# EAGLE board MAPE-CUN-Large-001-not_used (EAGLE 7.3.0)
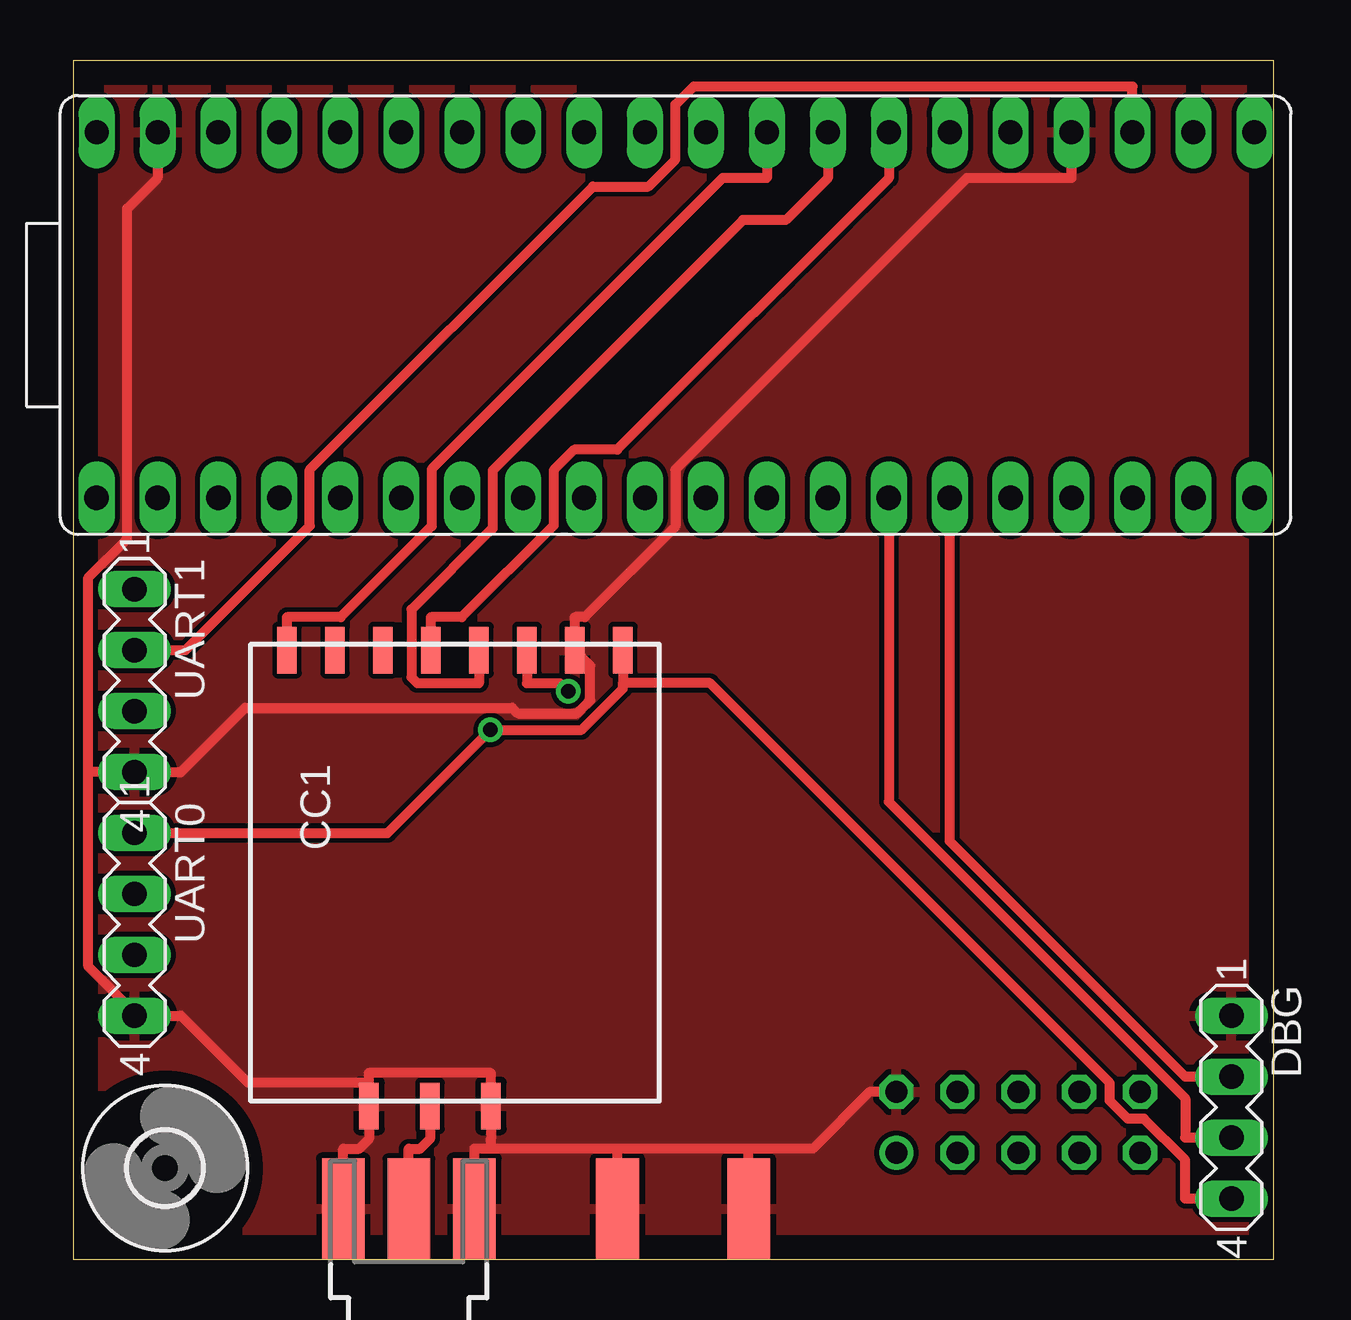
[diagram p0: board, top side]
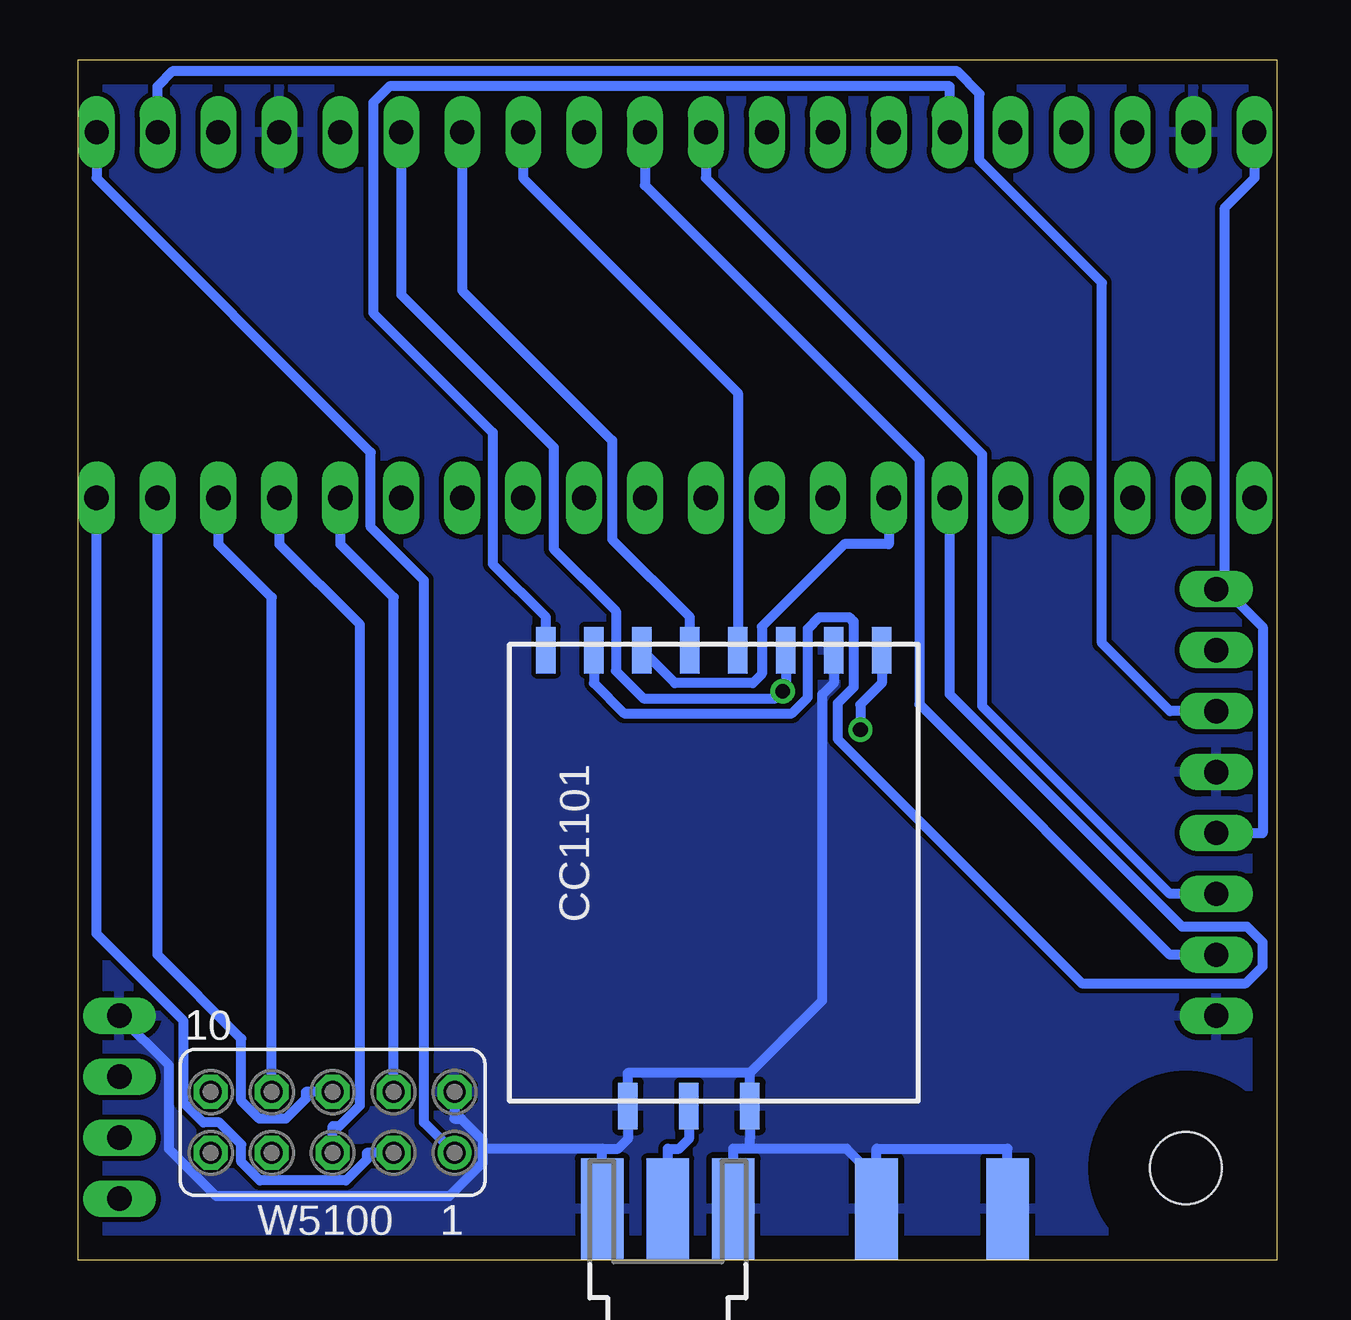
[diagram p1: board, bottom side, seen from below]

Size 50 x 50 mm. Coordinates in mm from the lower left corner, seen from the top.
Outline: 0,0 0,50 50,50 50,0 0,0
Copper layers (1*16): Top 0.035mm / dielectric 1.5mm / Bottom 0.035mm
Design rules "default": minimum track width 10mil, minimum drill 24mil, track to track 8mil, track to pad 8mil, pad to pad 8mil, via to via 8mil, smd to smd 8mil, copper to edge 40mil, drill to drill 8mil, minimum pad ring 10mil, minimum via ring 8mil, stop-mask expansion 4mil, vias tented up to drill 0mil, thermal gap 10mil
Net classes: 0 default: width 0.406 mm; 1 PWR: width 0.305 mm

## Footprints (pad centres in the part's own frame; a part is rotated, then mirrored left to right if it is on the bottom)
CC1101_MODULE1_SMD = smd 1.93 x 0.813: ANT 19,5.96; CSN 0,0; GDO0 0,2; GDO2 0,4; GND@0 0,12; GND@1 19,8.5; GND@2 19,3.42; MISO 0,6; MOSI 0,10; SCLK 0,8; VCC 0,14
MA04-1 = drill 1.016 long: 1 -3.81,0; 2 -1.27,0; 3 1.27,0; 4 3.81,0
3,0 = hole 3: 0,0
20-DIP = drill 1.016 pad 1.27 long: 1 -24.13,-7.62; 2 -21.59,-7.62; 3 -19.05,-7.62; 4 -16.51,-7.62; 5 -13.97,-7.62; 6 -11.43,-7.62; 7 -8.89,-7.62; 8 -6.35,-7.62; 9 -3.81,-7.62; 10 -1.27,-7.62; 11 1.27,-7.62; 12 3.81,-7.62; 13 6.35,-7.62; 14 8.89,-7.62; 15 11.43,-7.62; 16 13.97,-7.62; 17 16.51,-7.62; 18 19.05,-7.62; 19 21.59,-7.62; 20 24.13,-7.62 | drill 1 pad 1.27 long: 21 24.13,7.62; 22 21.59,7.62; 23 19.05,7.62; 24 16.51,7.62; 25 13.97,7.62; 26 11.43,7.62; 27 8.89,7.62; 28 6.35,7.62; 29 3.81,7.62; 30 1.27,7.62; 31 -1.27,7.62; 32 -3.81,7.62; 33 -6.35,7.62; 34 -8.89,7.62; 35 -11.43,7.62; 36 -13.97,7.62; 37 -16.51,7.62; 38 -19.05,7.62; 39 -21.59,7.62; 40 -24.13,7.62
FE05-2 = drill 0.914: 1 -5.08,1.27 | drill 0.914 octagon: 2 -5.08,-1.27; 3 -2.54,1.27; 4 -2.54,-1.27; 5 0,1.27; 6 0,-1.27; 7 2.54,1.27; 8 2.54,-1.27; 9 5.08,1.27; 10 5.08,-1.27
SMA = smd 4.191 x 1.778: 1 2.115,0; GND@1 2.115,2.733; GND@2 2.115,-2.733 | smd 4.191 x 1.778 bottom: GND@3 2.115,2.733; GND@4 2.115,-2.733

## Placement (x,y rotation side)
CC1  CC1101_MODULE1SMD  [CC1101_MODULE1_SMD]  8.89,25.4 270 top
CC1101  CC1101_MODULE1SMD  [CC1101_MODULE1_SMD]  30.48,25.4 270 bottom
DBG  [MA04-1]  48.26,6.35 270 top
H1  MOUNT-HOLE3.0  [3,0]  3.81,3.81 0 top
H2  MOUNT-HOLE3.0  [3,0]  -14.61,-6.35 0 top  (outside the outline)
U$1  MAPLEMINI  [20-DIP]  25.08,39.37 0 top
UART0  [MA04-1]  2.54,13.97 270 top
UART1  [MA04-1]  2.54,24.13 270 top
W5100  [FE05-2]  39.37,5.71 180 bottom
X1  SMA  [SMA]  25.4,0 90 bottom
X2  SMA  [SMA]  13.97,0 90 top

## Library data of the parts
CC1 CC1101 = wireless
DBG UART0 UART1 = con-lstb; OC_FARNELL: unknown; OC_NEWARK: unknown
H1 H2 = holes
U$1 = maplemini-small
W5100 = con-lsta; OC_FARNELL: unknown; OC_NEWARK: unknown
X1 X2 = sma

## Nets
+5V: U$1.21 W5100.1
CC_CS0: CC1.CSN U$1.29
CC_CS1: CC1101.CSN U$1.35
CC_IN0: U$1.33
CC_IN_0: CC1.GDO2
CC_IN_1: CC1101.GDO2 U$1.7
CC_OUT0: U$1.32
CC_OUT_0: CC1.GDO0
CC_OUT_1: CC1101.GDO0 U$1.6
GND: CC1.GND@0 CC1.GND@1 CC1.GND@2 CC1101.GND@0 CC1101.GND@1 CC1101.GND@2 DBG.1 U$1.24 U$1.39 UART0.4 UART1.4 W5100.2 X1.GND@1 X1.GND@2 X1.GND@3 X1.GND@4 X2.GND@1 X2.GND@2 X2.GND@3 X2.GND@4
MISO1: CC1.MISO CC1101.MISO U$1.27
MISO2: U$1.18 W5100.8
MOSI1: CC1.MOSI CC1101.MOSI U$1.26
MOSI2: U$1.17 W5100.5
N$3: CC1101.ANT X1.1
N$4: CC1.ANT X2.1
RX0: U$1.30 UART0.3
RX1: U$1.22 UART1.3
RX_DBG: DBG.3 U$1.14
SCK1: CC1.SCLK CC1101.SCLK U$1.28
SCK2: U$1.19 W5100.6
SWCLK: U$1.10
SWDIO: U$1.11
TX0: U$1.31 UART0.2
TX1: U$1.23 UART1.2
TX_DBG: DBG.2 U$1.15
VCC: CC1.VCC CC1101.VCC DBG.4 U$1.40 UART0.1 UART1.1
WIZ_CS: U$1.20 W5100.3
WIZ_RST: U$1.16 W5100.4

## Tracks (layer width: path | path; a pad name or v marks a point on that pad's centre or on a via)
+5V
  Bottom 0.406: U$1.21 49.21,45.08 37.78,33.65 37.78,30.53 35.56,28.31 35.56,5.71 W5100.1
CC_CS0
  Top 0.406: CC1.CSN 8.89,26.77 11.13,26.77 14.92,30.57 14.92,32.95 27.05,45.08 28.89,45.08 U$1.29
CC_CS1
  Bottom 0.406: CC1101.CSN 30.48,26.77 32.7,28.99 32.7,34.47 37.68,39.45 37.68,48.22 37,48.9 13.65,48.9 U$1.35
CC_IN_1
  Bottom 0.406: U$1.7 16.19,29.82 18.05,29.82 21.48,26.38 21.48,24.41 21.86,24.03 25.11,24.03 CC1101.GDO2
CC_OUT_1
  Bottom 0.406: U$1.6 13.65,23.56 3.96,13.87 1.25,13.87 0.61,13.23 0.61,12.21 1.3,11.52 8.14,11.52 18.33,21.7 18.33,23.18 17.66,23.84 17.66,26.6 17.83,26.77 19.09,26.77 19.57,26.3 19.57,23.43 20.23,22.77 27.22,22.77 28.48,24.03 CC1101.GDO0
GND
  Top 0.406: U$1.24 41.59,45.08 37.24,45.08 25.08,32.92 25.08,30.56 21.3,26.77 20.89,26.77 CC1.GND@0 21.53,24.76 21.53,23.3 20.99,22.76 18.51,22.76 18.28,22.99 7.14,22.99 4.47,20.32 UART1.4 0.61,20.32 | 2.82,10.16 2.67,10.16 0.61,12.22 0.61,20.32 | 2.82,10.16 4.47,10.16 7.26,7.37 12.31,7.37 | UART0.4 2.82,10.16 | U$1.39 3.49,45.08 2.22,43.81 2.22,30.04 0.61,28.43 0.61,20.32 | 17.39,4.62 16.7,4.62 X2.GND@4 | 22.67,4.62 17.39,4.62 | 17.39,4.62 17.39,5.03 CC1.GND@1 17.39,7.77 12.31,7.77 12.31,7.37 | 12.31,7.37 CC1.GND@2 12.31,5.03 11.9,4.62 11.24,4.62 X2.GND@3 | W5100.2 33.17,6.99 30.8,4.62 28.13,4.62 | X1.GND@3 28.13,4.62 | 28.13,4.62 22.67,4.62 | X1.GND@4 22.67,4.62
  Bottom 0.406: 21.98,7.77 18.96,10.8 18.96,23.55 18.48,24.03 CC1101.GND@0 | 21.98,7.77 27.06,7.77 CC1101.GND@2 27.06,5.03 27.47,4.62 28.13,4.62 | 21.98,4.62 22.67,4.62 X1.GND@4 | 16.7,3.37 17.95,4.62 21.98,4.62 | 21.98,4.62 21.98,5.03 CC1101.GND@1 21.98,7.77 | 16.7,3.37 16.7,4.62 11.24,4.62 X2.GND@3 | X2.GND@4 16.7,3.37 | W5100.2 34.29,5.87 34.01,5.87 33.12,4.98 33.12,4.62 | 33.12,4.62 33.12,4.03 34.52,2.64 44.22,2.64 46.19,4.6 46.19,8.09 DBG.1 | 28.13,4.62 33.12,4.62 | 28.13,4.62 28.13,4.46 X1.GND@3
  pour Bottom: 0,0 0,50.8 50.8,50.8 50.8,0
  pour Top: 0,0 0,50.8 50.8,50.8 50.8,0
MISO1
  Top 0.406: CC1.MISO 14.89,26.77 16.18,26.77 20,30.6 20,32.9 20.86,33.76 22.66,33.76 33.97,45.08 U$1.27
  Bottom 0.406: CC1101.MISO 24.48,26.77 27.72,30.02 27.72,34.14 33.97,40.39 U$1.27
MISO2
  Bottom 0.406: U$1.18 44.13,29.82 41.91,27.6 W5100.8
MOSI1  (via drill 0.61 pad 1.02)
  Top 0.406: v20.62,23.68 20.27,24.03 18.89,24.03 CC1.MOSI
  Bottom 0.406: U$1.26 36.51,40.21 30.16,33.86 30.16,29.62 27.57,27.03 27.57,24.54 26.42,23.39 20.91,23.39 v20.62,23.68 20.48,23.82 20.48,24.71 CC1101.MOSI
MOSI2
  Bottom 0.406: U$1.17 41.59,29.82 38.24,26.46 38.24,6.42 39.09,5.56 39.37,5.56 W5100.5
N$3
  Bottom 0.406: X1.1 25.4,4.62 24.93,4.62 24.52,5.03 CC1101.ANT
N$4
  Top 0.406: X2.1 13.97,4.62 14.44,4.62 14.85,5.03 CC1.ANT
RX0
  Bottom 0.406: U$1.30 26.35,44.78 14.92,33.35 14.92,23.15 4.47,12.7 UART0.3
RX1
  Bottom 0.406: U$1.22 46.67,48.9 46.06,49.52 13.34,49.52 12.41,48.59 12.41,45.82 7.3,40.72 7.3,25.69 4.47,22.86 UART1.3
RX_DBG
  Top 0.406: DBG.3 46.33,5.08 46.33,6.72 33.97,19.08 U$1.14
SCK1
  Top 0.406: CC1.SCLK 16.89,24.03 14.31,24.03 14.08,24.27 14.08,27.09 17.46,30.48 17.46,32.9 27.9,43.33 29.69,43.33 31.43,45.08 U$1.28
  Bottom 0.406: U$1.28 31.43,45.08 22.48,36.12 CC1101.SCLK
SCK2
  Bottom 0.406: W5100.6 40.49,6.99 40.49,6.71 41.33,5.87 42.43,5.87 43.18,6.62 43.18,9.21 46.67,12.7 U$1.19
TX0
  Bottom 0.406: U$1.31 23.81,45.08 12.3,33.57 12.3,23.07 4.47,15.24 UART0.2
TX1
  Top 0.406: U$1.23 44.13,48.9 25.85,48.9 25.08,48.14 25.08,45.85 23.96,44.72 21.64,44.72 9.84,32.92 9.84,30.58 4.67,25.4 UART1.2
TX_DBG
  Top 0.406: U$1.15 36.51,17.44 46.33,7.62 DBG.2
VCC  (via drill 0.61 pad 1.02)
  Top 0.406: 22.89,24.03 22.89,23.8 21.17,22.08 v17.37,22.08 13.08,17.78 UART0.1 | 22.89,24.03 26.51,24.03 43.18,7.36 43.18,6.62 43.93,5.87 44.61,5.87 46.33,4.15 46.33,2.54 DBG.4 | CC1.VCC 22.89,24.03
  Bottom 0.406: 2.18,27.94 0.61,26.37 0.61,17.78 UART0.1 | 2.18,27.94 2.18,43.85 0.95,45.08 U$1.40 | UART1.1 2.18,27.94 | v17.37,22.08 17.37,23.14 16.48,24.03 CC1101.VCC
WIZ_CS
  Bottom 0.406: W5100.3 37.95,4.45 37.95,4.17 38.82,3.3 42.41,3.3 43.18,4.07 43.18,4.8 44.09,5.71 44.76,5.71 45.58,6.53 45.58,9.95 49.21,13.58 U$1.20
WIZ_RST
  Bottom 0.406: W5100.4 36.83,27.6 39.05,29.82 U$1.16